# EAGLE board LMT70 (EAGLE 7.3.0)
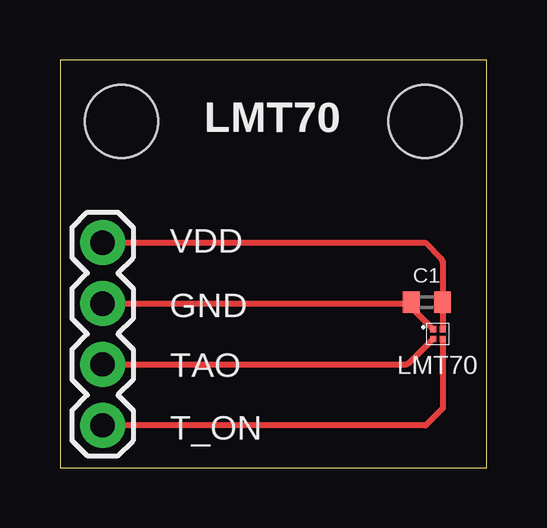
[diagram p0: board, top side]
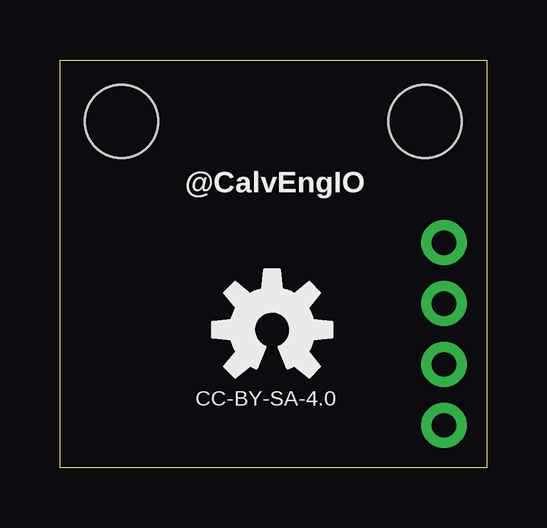
[diagram p1: board, bottom side, seen from below]

Size 17.78 x 17.02 mm. Coordinates in mm from the lower left corner, seen from the top.
Outline: 0,0 17.78,0 17.78,17.02 0,17.02 0,0
Copper layers (1*16): Top 0.035mm / dielectric 1.5mm / Bottom 0.035mm
Design rules "default": minimum track width 10mil, minimum drill 24mil, track to track 8mil, track to pad 8mil, pad to pad 8mil, via to via 8mil, smd to smd 8mil, copper to edge 40mil, drill to drill 8mil, minimum pad ring 10mil, minimum via ring 8mil, stop-mask expansion 4mil, vias tented up to drill 0mil, thermal gap 10mil
Holes 3.05 mm at 15.21,14.45 2.57,14.45

## Footprints (pad centres in the part's own frame; a part is rotated, then mirrored left to right if it is on the bottom)
C0402 = smd 0.7 x 0.9: 1 -0.65,0; 2 0.65,0
JMP-04 = drill 1.016 pad 1.88: 1 0,0; 2 2.54,0; 3 5.08,0; 4 7.62,0
4-DSBGA = smd 0.26 x 0.26: A1 -0.2,0.2; A2 0.2,0.2; B1 -0.2,-0.2; B2 0.2,-0.2

## Placement (x,y rotation side)
C1  [C0402]  15.29,6.91 180 top
JMP  JMP-04  [JMP-04]  1.78,1.78 90 top
LMT70  LMT70/A  [4-DSBGA]  15.75,5.59 0 top
LOGO1  OSHW-LOGOM  [OSHW-LOGO-M]  8.94,5.77 0 bottom

## Library data of the parts
C1 = resistor
JMP = CalvEngIO-Connectors
LMT70 = CalvEngIO-Sensors
LOGO1 = SparkFun-Aesthetics

## Nets
GND: C1.2 JMP.3 LMT70.A1
T_ON: JMP.1 LMT70.B2
TAO: JMP.2 LMT70.B1
VDD: C1.1 JMP.4 LMT70.A2

## Tracks (layer width: path | path; a pad name or v marks a point on that pad's centre or on a via)
GND
  Top 0.254: JMP.3 14.59,6.86 C1.2 14.64,6.7 LMT70.A1
T_ON
  Top 0.254: JMP.1 15.24,1.78 15.95,2.49 LMT70.B2
TAO
  Top 0.254: JMP.2 14.37,4.32 arc45 14.55,4.39 LMT70.B1
VDD
  Top 0.254: JMP.4 arc45 1.84,9.37 15.24,9.37 15.87,8.74 arc-45 15.95,8.56 C1.1 LMT70.A2

## Text on the board
tNames: LMT70 | VDD | GND | TAO | T_ON
bNames: @CalvEngIO | CC-BY-SA-4.0